# Altium PCB spiflash.PcbDoc
Units mm, origin at the board's own origin, x right, y up, seen from the top; angles counter-clockwise.
Board outline 12.72 x 21.94 mm, 2 copper layers (Top Layer, Bottom Layer); 3 components, 8 nets, 20 pads, 2 vias.
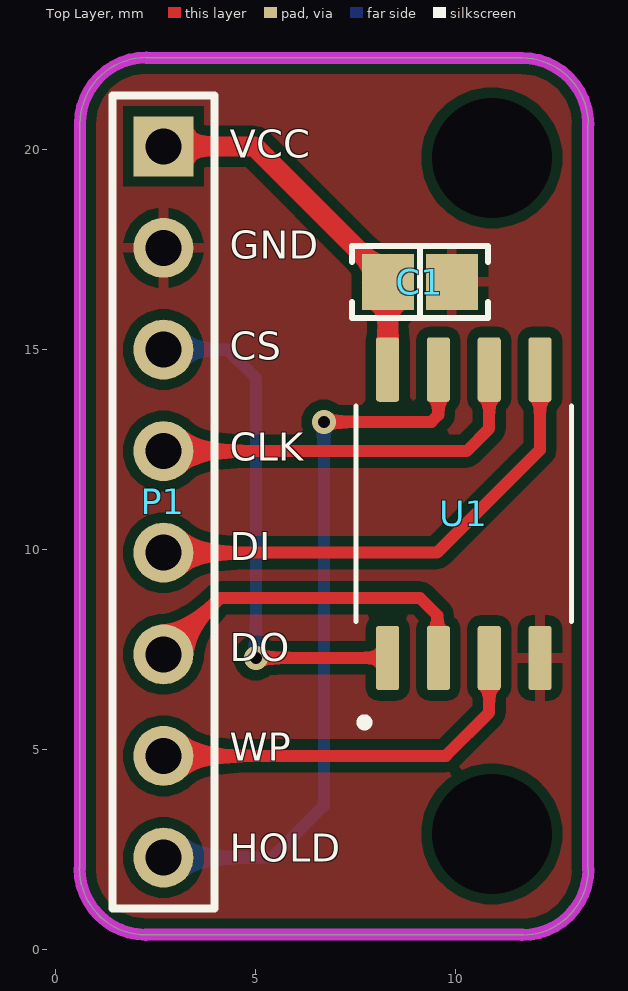
[diagram p0: Top Layer view]
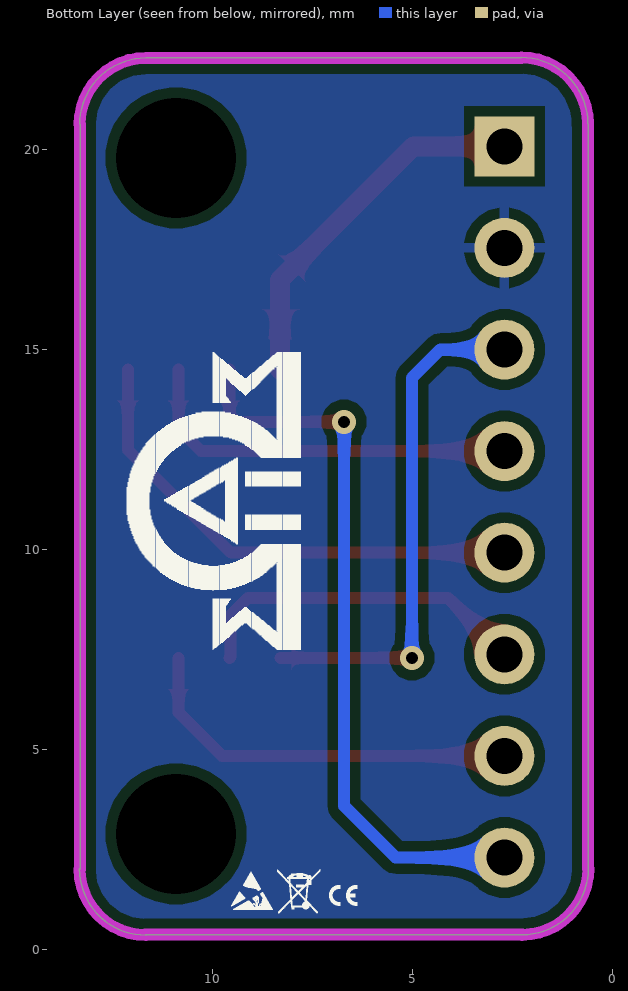
[diagram p1: Bottom Layer view, seen from below]

## Layer stack, top to bottom
Top Solder: solder mask 0.0102, Solder Resist, Dk 3.5
Top Layer: signal copper 0.0356
Dielectric 1: dielectric 0.32, FR-4, Dk 4.8
Bottom Layer: signal copper 0.0356
Bottom Solder: solder mask 0.0102, Solder Resist, Dk 3.5

## Board outline
2.247,0.377 cw(c2.25,2.036) 0.59,2.04 0.6,2.024 0.6,20.653 0.602,20.653 cw(c2.261,20.65) 2.265,22.31 2.265,22.3 11.645,22.3 11.653,22.298 cw(c11.65,20.639) 13.31,20.635 13.3,20.645 13.3,2.012 13.313,2.025 cw(c11.653,2.027) 11.65,0.368 11.669,0.381

## Design rules (kind name [scope] priority, off if disabled: settings)
Clearance [All] p1: gap=0.254 ignorepadtopadclearanceinfootprint=FALSE except(0: Arc-Hole Track-Hole SMDPad-Hole THPad-Hole Via-Hole Fill-Hole Poly-Hole Region-Hole Text-Hole)
HoleSize [All] p1: absolutevalues=TRUE maxlimit=4 minlimit=0.025 maxpercent=80.000 minpercent=20.000
MinimumSolderMaskSliver [All] p1: minsoldermaskwidth=0.05
PolygonConnect [All] p1: connectstyle=Relief reliefconductorwidth=0.254 reliefentries=4 polygonreliefangle="90 Angle" airgapwidth=0.254
RoutingVias [All] p1: holewidth=0.711 width=1.27 viastyle="Through Hole" minholewidth=0.2 minwidth=0.2 maxholewidth=0.711 maxwidth=1.27
SilkToSilkClearance [All] p1: silktosilkclearance=0.05
SilkToSolderMaskClearance [IsPad] p1: minsilkscreentomaskgap=0.05 clearancetoexposedcopper=TRUE
SolderMaskExpansion [All] p1: expansion=0.102 istentingtop=FALSE
Width [All] p1: maxlimit=0.5 minlimit=0.254 preferedwidth=0.3 minimp=50.000000 maximp=50.000000 favimp=50.000000
26 further rules are at their usual default settings.

## Components (designator, comment, footprint, x,y, rotation, side; value= is the part's Value field where it differs from the comment)
C1 "0.1 µF" "CAP 0805_2012" 9.1,16.7 r180 top
P1 "Header 8" HDR1X8 2.69,20.089 r270 top
U1 "W25Q16JVSSIQ TR" SOIC127P790X216-8N 10.071,10.268 r90 top

## Footprints (in the part's own frame and the unit in brackets; to place one, negate y for a bottom-side part, rotate by r counter-clockwise, add the part's x,y. Pads: shape width x height; smd on the part's side, far side on the other; paste and mask are expansions set on the pad)
"CAP 0805_2012" [mm] "Chip Capacitor, 2-Leads, Body 2.00x1.20mm, IPC Medium Density"
  rect 1.3x1.4 smd: 1(-0.8,0) 2(0.8,0)
  silkscreen extent -1.7,-0.9 1.7,0.9, body extent -1,-0.64 1,0.64, height 1.26
HDR1X8 [mm] "Connector; Header; 8 Position"
  rect 1.5x1.5 hole 0.9: 1(0,0)
  round 1.5 hole 0.9: 2(2.54,0) 3(5.08,0) 4(7.62,0) 5(10.16,0) 6(12.7,0) 7(15.24,0) 8(17.78,0)
  silkscreen extent -1.27,-1.27 19.05,1.27
SOIC127P790X216-8N [mm]
  rrect25% 1.61x0.58 smd: 1(-2.97,1.778) 2(-2.97,0.508) 3(-2.97,-0.762) 4(-2.97,-2.032) 5(4.24,-2.032) 6(4.24,-0.762) 7(4.24,0.508) 8(4.24,1.778)
  silkscreen extent -4.68,-2.82 3.32,2.56, body extent -3.31,-2.77 4.58,2.51, height 2.16

## Part data
C1: library part CC0805MRX7R9BB104, "CAP CER 0.1UF 50V X7R 0805", Device Package="0805 (2012 Metric)", manufacturer=Yageo, Operating Temperature="-55°C ~ 125°C", Supplier Part Number 1=311-4351-1-ND, Temperature Coefficient=X7R, Tolerance=±20%, Voltage - Rated=50V, Applications="General Purpose", Capacitance="0.1 µF", componentlink1description=Datasheet, componentlink1url=https://www.yageo.com/upload/media/product/productsearch/datasheet/mlcc/UPY-GPHC_X7R_6.3V-to-50V_18.pdf, componentlink2description="DigiKey Link", componentlink2url=https://www.digikey.com/en/products/detail/yageo/CC0805MRX7R9BB104/5884281, lastupdated="9.02.2024 20:16:09", Lifecycle Status=Active, Minimum Order=1, Mounting Type="Surface Mount, MLCC", Package / Case="0805 (2012 Metric)", packaging=TapeAndReel, Part Number=CC0805MRX7R9BB104, Part Status=Active, partid=2475, price=0.01, series=CC, Size / Dimension="0.079\" L x 0.049\" W (2.00mm x 1.25mm)", Supplier 1=DigiKey, Thickness (Max)="0.037\" (0.95mm)"
P1: "Header, 8-Pin", LatestRevisionDate=17-Jul-2002, LatestRevisionNote="Re-released for DXP Platform.", Publisher="Altium Limited"
U1: "IC FLASH 16MBIT SPI/QUAD 8SOIC", DigiKey Part Number=W25Q16JVSSIQTR-ND, manufacturer="Winbond Electronics", Datasheet=https://www.winbond.com/resource-files/w25q16jv%20spi%20revg%2003222018%20plus.pdf, Detailed Description="FLASH - NOR Memory IC 16Mbit SPI - Quad I/O 133 MHz 8-SOIC", Manufacturer Product Number="W25Q16JVSSIQ TR", UNIT PRICE=$0.58000

## Free pads (board coordinates)
  round 0 hole 3: ""(10.9,2.9) ""(10.9,19.8)

## Via types
v1: diameter 0.6, hole 0.3, Top Layer to Bottom Layer, 2 vias

## Nets (pads, with @x,y where several pads share a name; then routed paths per layer and width w, separated by ;. In a path a pad name is that pad's centre, name@x,y a point inside that pad or via, vN(x,y) a via of type N, cw(c..) or ccw(c..) an arc to the next point about the centre after c; other vN are vias at no path point)
CLK: P1.4 U1.6 | length 9.9
  Top Layer w0.3: P1.4 10.269,12.469 10.833,13.033 U1.6
CS: P1.3 U1.1 | length 12.9
  Top Layer w0.3: v1(5,7.3) 8.291,7.3 U1.1
  Bottom Layer w0.3: P1.3 4.291,15.009 5,14.3 v1(5,7.3)
DI: P1.5 U1.5 | length 12.5
  Top Layer w0.3: P1.5 9.529,9.929 12.103,12.503 U1.5
DO: P1.6 U1.2 | length 8.7
  Top Layer w0.3: P1.6 4.101,8.8 9.1,8.8 9.538,8.362 9.538,7.323 U1.2
GND: C1.1 P1.2 U1.4
HOLD: P1.8 U1.7 | length 18.2
  Top Layer w0.3: v1(6.7,13.2) 9.387,13.2 9.563,13.376 U1.7
  Bottom Layer w0.3: P1.8 5.409,2.309 6.7,3.6 v1(6.7,13.2)
VCC: C1.2 P1.1 U1.8 | length 9.2
  Top Layer w0.5: P1.1 4.961,20.089 8.3,16.75 C1.2 8.297,16.697 8.297,14.511 U1.8
WP: P1.7 U1.3 | length 10
  Top Layer w0.3: P1.7 9.749,4.849 10.833,5.933 U1.3

## Polygon pours and split planes (outlines as drawn)
GND on Top Layer "GND_L01_P002" (solid, pour order 2): 0.6,22.3 13.3,22.3 13.3,0.4 0.6,0.4
GND on Bottom Layer "GND_L02_P003" (solid, pour order 3): 0.6,22.3 13.3,22.3 13.3,0.4 0.6,0.4

## Keep-outs
Keep-Out Layer:
  lines w0.3: 0.59,2.04 ccw(c2.25,2.036) 2.247,0.377 ; 0.6,2.024 0.6,20.653 ; 0.602,20.653 cw(c2.261,20.65) 2.265,22.31 ; 2.243,0.381 11.669,0.381 ; 2.265,22.3 11.645,22.3 ; 11.65,0.368 ccw(c11.653,2.027) 13.313,2.025 ; 11.653,22.298 cw(c11.65,20.639) 13.31,20.635 ; 13.3,2.012 13.3,20.645

## Silkscreen, mask and mechanical layers (free items; w line width, h text height)
Top Overlay:
  text "VCC" at 4.35,19.563 h1.2
  text "GND" at 4.35,17.041 h1.2
  text "CS" at 4.35,14.518 h1.2
  text "CLK" at 4.35,11.997 h1.2
  text "DI" at 4.35,9.503 h1.2
  text "DO" at 4.35,6.981 h1.2
  text "WP" at 4.35,4.487 h1.2
  text "HOLD" at 4.35,1.964 h1.2
Bottom Overlay:
  drawing of 4459 lines, arcs and shapes, not listed